# Altium PCB USB_CAN.PcbDoc
Units mm, origin at the board's own origin, x right, y up, seen from the top; angles counter-clockwise.
Board outline 50 x 33 mm, 2 copper layers (Top Layer, Bottom Layer); 42 components, 27 nets, 156 pads, 9 vias.
Unrouted connection lines stored in the file: 8.
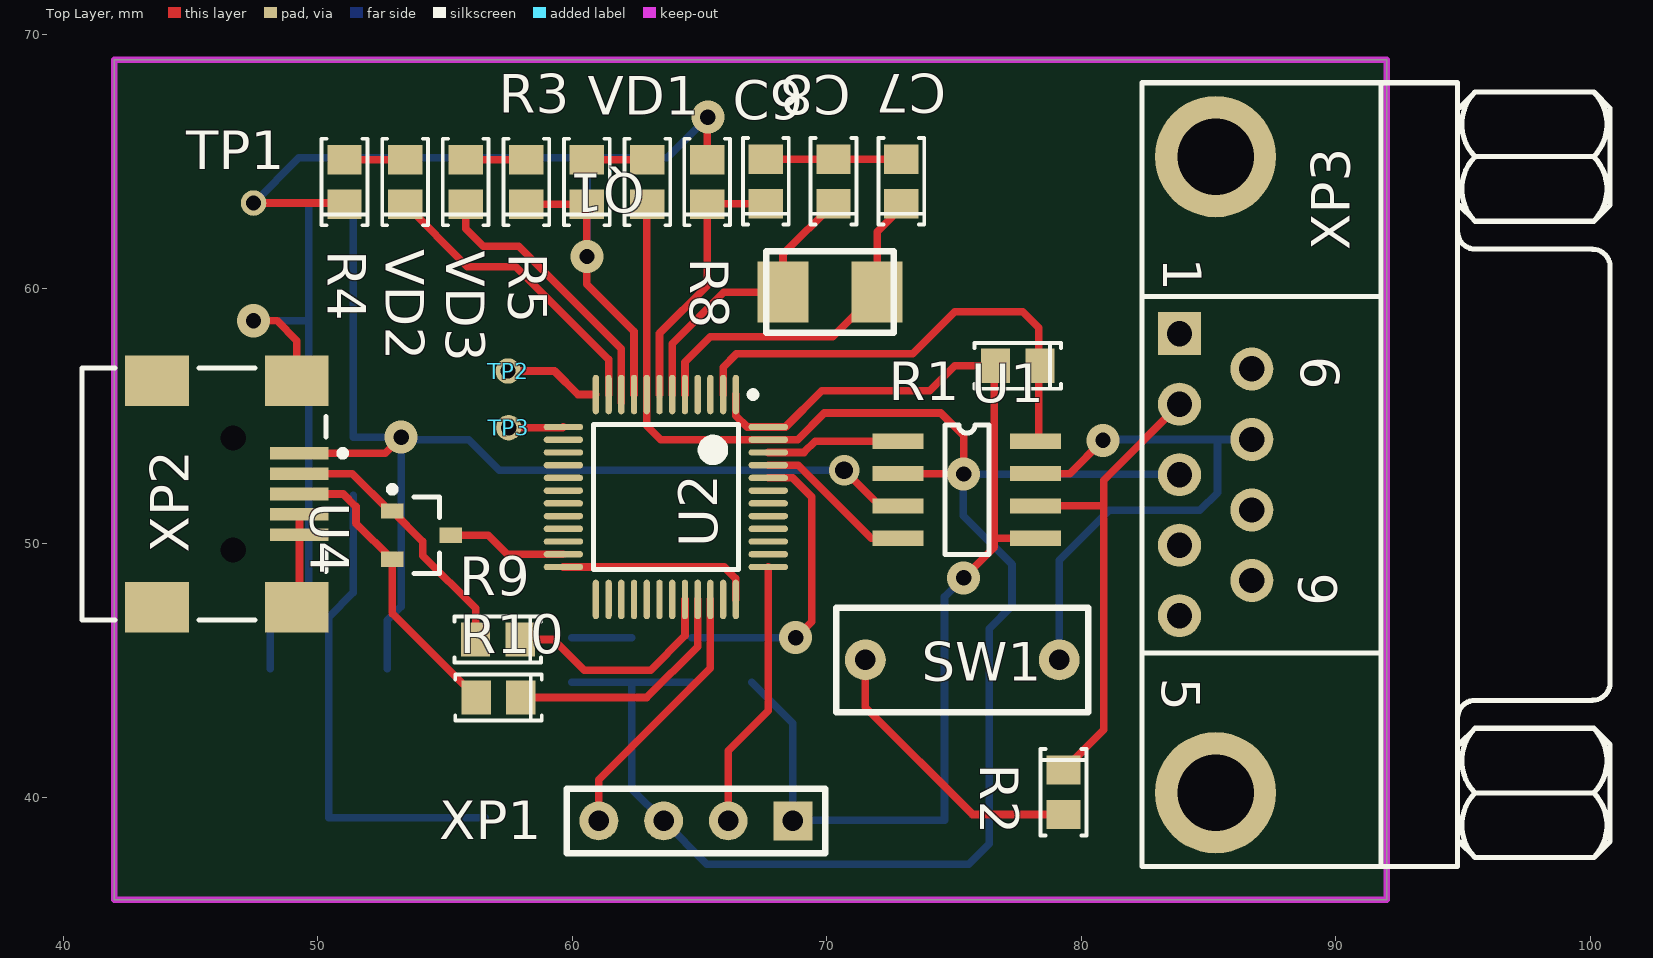
[diagram p0: Top Layer view]
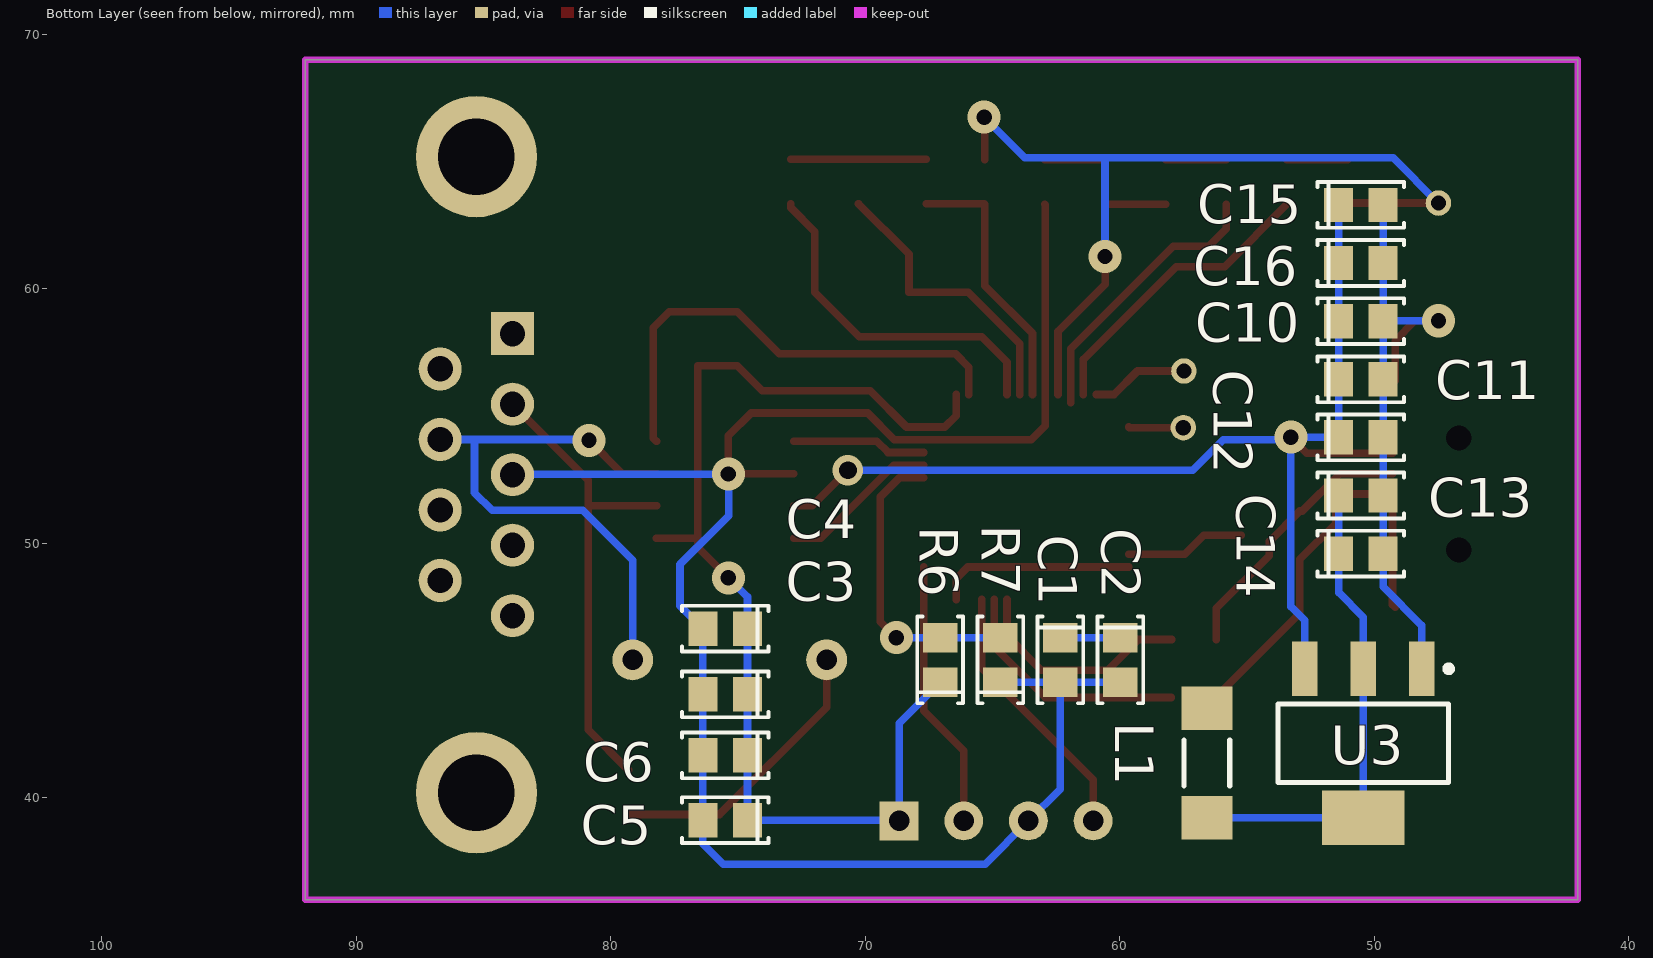
[diagram p1: Bottom Layer view, seen from below]

## Layer stack, top to bottom
Top Solder: solder mask 0.0102, Solder Resist, Dk 3.5
Top Layer: signal copper 0.0356
Dielectric 1: dielectric 0.32, FR-4, Dk 4.8
Bottom Layer: signal copper 0.0356
Bottom Solder: solder mask 0.0102, Solder Resist, Dk 3.5

## Board outline
42,36 92,36 92,69 42,69

## Design rules (kind name [scope] priority, off if disabled: settings)
Clearance [All] p1: gap=0.254 ignorepadtopadclearanceinfootprint=FALSE except(0: Arc-Hole Track-Hole SMDPad-Hole THPad-Hole Via-Hole Fill-Hole Poly-Hole Region-Hole Text-Hole; 0.2: Arc-Arc Arc-Track Arc-SMDPad Track-Track Track-SMDPad SMDPad-SMDPad)
HoleSize [All] p1: absolutevalues=TRUE maxlimit=3 minlimit=0.3 maxpercent=80.000 minpercent=20.000
PolygonConnect [All] p1: connectstyle=Relief reliefconductorwidth=0.254 reliefentries=4 polygonreliefangle="90 Angle" airgapwidth=0.254
RoutingVias [All] p1: holewidth=0.7 width=1.2 viastyle="Through Hole" minholewidth=0.5 minwidth=1 maxholewidth=0.7 maxwidth=1.5
SolderMaskExpansion [All] p1: expansion=0.102
UnRoutedNet [All] p1: checkbadconnections=TRUE
Width [All] p1: maxlimit=0.4 minlimit=0.2 preferedwidth=0.3
28 further rules are at their usual default settings.

## Classes and differential pairs
component class CAN: C1 C2 R1 R2 SW1 U1 XP3
component class MCU: C3 C4 C5 C6 C7 C8 C9 Q1 R3 R4 R5 R6 R7 R8 TP1 TP2 TP3 U2 VD1 VD2 VD3 XP1
component class PWR: C10 C11 C12 C13 C14 L1 U3
component class USB: C15 C16 R9 R10 U4 XP2

## Components (designator, comment, footprint, x,y, rotation, side; value= is the part's Value field where it differs from the comment)
C1 "" SMD_0805 62.333,45.425 r270 bottom value=100nF
C2 "" SMD_0805 59.975,45.425 r270 bottom value=100nF
C3 "100nF" SMD_0805 75.5,44.075 r0 bottom
C4 "100nF" SMD_0805 75.5,46.65 r0 bottom
C5 "100nF" SMD_0805 75.5,39.125 r0 bottom
C6 "100nF" SMD_0805 75.5,41.675 r0 bottom
C7 "22pF" SMD_0805 72.925,64.225 r90 top
C8 "22pF" SMD_0805 70.263,64.225 r90 top
C9 "100nF" SMD_0805 67.6,64.225 r90 top
C10 "1uF" SMD_0805 50.525,58.733 r180 bottom
C11 "1uF" SMD_0805 50.525,56.45 r180 bottom
C12 "1uF" SMD_0805 50.525,54.167 r180 bottom
C13 "100n" SMD_0805 50.525,49.6 r180 bottom
C14 "100n" SMD_0805 50.525,51.883 r180 bottom
C15 "" SMD_0805 50.525,63.3 r180 bottom value=100nF
C16 "" SMD_0805 50.525,61.017 r180 bottom value=100nF
L1 "" INDC4516AM 56.575,41.375 r90 bottom
Q1 "8MHz" 5032-2Pin_CRYSTAL 70.125,59.875 r180 top
R1 "10k" SMD_0805 77.5,56.975 r180 top
R2 "120" SMD_0805 79.3,40.225 r270 top
R3 "10k" SMD_0805 60.57,64.2 r90 top
R4 "10k" SMD_0805 51.05,64.2 r90 top
R5 "10k" SMD_0805 58.19,64.2 r90 top
R6 "0" SMD_0805 67.05,45.425 r90 bottom
R7 "10k" SMD_0805 64.692,45.425 r90 bottom
R8 "10k" SMD_0805 65.3,64.2 r90 top
R9 "22" SMD_0805 57.075,46.225 r180 top
R10 "22" SMD_0805 57.1,43.95 r180 top
SW1 "SW" DIP_SW_1 75.325,45.425 r270 top
TP1 "" TP 47.475,63.375 r90 top
TP2 "" TP 57.475,56.775 r90 top
TP3 "" TP 57.5,54.55 r90 top
U1 "TJA1051" SO8-150mil 72.8,54.015 r0 top
U2 "STM32F072C8T6" STM-LQFP48_L 63.675,51.825 r270 top
U3 "AMS1117" SOT-223 50.425,42.15 r270 bottom
U4 "CDSOT23-SM712" SOT23-3 54.075,50.325 r0 top
VD1 "" SMD_0805 62.95,64.2 r90 top
VD2 "" SMD_0805 53.43,64.2 r90 top
VD3 "" SMD_0805 55.81,64.2 r90 top
XP1 "CON_4" HEAD-1/4/2.54 68.665,39.1 r270 top
XP2 "USB" USB/SM0.8-6H5 41.43,51.943 r180 top
XP3 "CON_11" DSUB1.385-2H9A 94.775,52.7 r270 top locked

## Footprints (in the part's own frame and the unit in brackets; to place one, negate y for a bottom-side part, rotate by r counter-clockwise, add the part's x,y. Pads: shape width x height; smd on the part's side, far side on the other; paste and mask are expansions set on the pad)
5032-2Pin_CRYSTAL [mm]
  rect 2x2.4 smd: 1(-1.85,0) 2(1.85,0)
  silkscreen extent -2.5,-1.6 2.5,1.6
DIP_SW_1 [mm] "DIP_SWITCH"
  round 1.6 hole 0.8: 1(0,3.81) 2(0,-3.81)
  silkscreen extent -2.05,-4.95 2.05,4.95
DSUB1.385-2H9A [mm] "Connector; D Subminiature AMPLIMITE 2000; 9 Position; Right Angle"
  rect 1.69x1.69 hole 1: 1(-5.54,-10.92)
  round 1.69 hole 1: 2(-2.77,-10.92) 3(0,-10.92) 4(2.77,-10.92) 5(5.54,-10.92) 6(-4.155,-8.08) 7(-1.385,-8.08) 8(1.385,-8.08) 9(4.155,-8.08)
  round 4.76 hole 3: 10(-12.495,-9.5) 11(12.495,-9.5)
  silkscreen extent -15.4,-12.4 15.4,6, body extent -15.4,-12.4 15.4,6.06, height 12.75
HEAD-1/4/2.54 [mil]
  rect 60x60 hole 31.5: 1(0,0)
  round 60 hole 31.5: 2(0,-100) 3(0,-200) 4(0,-300)
  silkscreen extent -50,-350 50,50
INDC4516AM [mm] "Chip Inductor, Body 4.5x1.6mm, IPC Low Density"
  rect 1.7x2 smd: 1(-2.15,0) 2(2.15,0)
  silkscreen extent -0.9,-0.9 0.9,0.9, body extent -2.4,-0.95 2.4,0.95, height 1.8
SMD_0805 [mm] "Chip smd, 2-Leads, Body 2.00x1.25mm, IPC Medium Density"
  rect 1.15x1.35 smd: 1(-0.875,0) 2(0.875,0)
  silkscreen extent -1.7,-0.9 1.7,0.9
SO8-150mil [mm]
  rect 2x0.6 smd: 1(0,0) 2(0,-1.27) 3(0,-2.54) 4(0,-3.81) 5(5.4,-3.81) 6(5.4,-2.54) 7(5.4,-1.27) 8(5.4,0)
  silkscreen extent 1.84,-4.44 3.56,0.64
SOT23-3 [mm]
  rect 0.9x0.6 smd: 1(-1.15,0.95) 2(-1.15,-0.95) 3(1.15,0)
  silkscreen extent -1.27,-1.5 0.7,1.92, body extent -0.7,-1.5 0.7,1.5, height 1.1
SOT-223 [mm]
  rect 2.15x1 smd: 1(-2.925,2.3) 2(-2.925,0) 3(-2.925,-2.3)
  rect 2.15x3.25 smd: 4(2.925,0)
  silkscreen extent -3.05,-3.35 1.55,3.47, body extent -1.85,-3.35 1.85,3.35, height 1.8
STM-LQFP48_L [mm] "QFP, 48-Leads, Body 7x7mm, Pitch 0.5mm, IPC High Density"
  oval 1.55x0.25 smd: 1(-4.025,2.75) 2(-4.025,2.25) 3(-4.025,1.75) 4(-4.025,1.25) 5(-4.025,0.75) 6(-4.025,0.25) 7(-4.025,-0.25) 8(-4.025,-0.75) 9(-4.025,-1.25) 10(-4.025,-1.75) 11(-4.025,-2.25) 12(-4.025,-2.75) 25(4.025,-2.75) 26(4.025,-2.25) 27(4.025,-1.75) 28(4.025,-1.25) 29(4.025,-0.75) 30(4.025,-0.25) 31(4.025,0.25) 32(4.025,0.75) 33(4.025,1.25) 34(4.025,1.75) 35(4.025,2.25) 36(4.025,2.75)
  oval 0.25x1.55 smd: 13(-2.75,-4.025) 14(-2.25,-4.025) 15(-1.75,-4.025) 16(-1.25,-4.025) 17(-0.75,-4.025) 18(-0.25,-4.025) 19(0.25,-4.025) 20(0.75,-4.025) 21(1.25,-4.025) 22(1.75,-4.025) 23(2.25,-4.025) 24(2.75,-4.025) 37(2.75,4.025) 38(2.25,4.025) 39(1.75,4.025) 40(1.25,4.025) 41(0.75,4.025) 42(0.25,4.025) 43(-0.25,4.025) 44(-0.75,4.025) 45(-1.25,4.025) 46(-1.75,4.025) 47(-2.25,4.025) 48(-2.75,4.025)
  silkscreen extent -4.15,-2.85 2.85,3.55, body extent -3.5,-3.5 3.5,3.5, height 1.6
TP [mm]
  round 1 hole 0.6: 1(0,0)
USB/SM0.8-6H5 [mm] "Connector; USB2.0, Type B, SM; 5 Position; Right Angle"
  rect 2.3x0.5 smd: 1(-7.85,-1.6) 2(-7.85,-0.8) 3(-7.85,0) 4(-7.85,0.8) 5(-7.85,1.6)
  rect 2.5x2 smd: 6(-7.75,4.45) 7(-2.25,4.45) 8(-7.75,-4.45) 9(-2.25,-4.45)
  round 0.6 hole 1: MH1(-5.25,2.2) MH2(-5.25,-2.2)
  silkscreen extent -9.68,-4.95 0.7,4.95, body extent -8.9,-4.95 0.7,4.95, height 3.9

## Part data
C1 C2 C3 C4 C5 C6 C7 C8 C9 C10 C11 C12 C13 C14 C15 C16: library part C_NONE_POLAR, "None polar capacitor"
L1: library part FB
Q1: library part CRYSTAL, "Crystal oscillator"
R1 R2 R3 R4 R5 R6 R7 R8 R9 R10: library part RES, "Resistor"
SW1: "Switch"
TP1 TP2 TP3: library part TP, "TP"
U2: "ARM Cortex-M0 32-bit MCU, 64 KB Flash, 8 KB Internal RAM, 39 I/Os, 48-pin LQFP, -40 to 85 degC, Tray", I/Os (High Current)=39, Operating Frequency(F) (Processor speed) (MHz)=48, PartNumber=STM32F030C8T6, Supplier Part Number 1=497-14043-ND, Supply Voltage(Vcc) min (V)=2.4, ComponentLink1Description="Manufacturer URL", ComponentLink1URL=http://www.st.com/web/en/home.html, ComponentLink2Description=Datasheet, ComponentLink2URL=http://www.st.com/st-web-ui/static/active/en/resource/technical/document/datasheet/DM00088500.pdf, ComponentLink3Description="Package Specification", ComponentLink3URL=http://www.st.com/st-web-ui/static/active/en/resource/technical/document/datasheet/DM00058181.pdf, Core="ARM Cortex-M0", DatasheetVersion="Rev. 1", FLASH Size (Prog) (kB)=64, Internal RAM Size (kB)=8, Mounting Technology="Surface Mount", PackageDescription="48-Pin Low Profile Quad Flat Package, 7 x 7 mm Body, 0.5 mm Pitch", PackageReference=LQFP48, PackageVersion="Rev. 6, 06/2013", Packing=Tray, Supplier 1=Digi-Key, Supplier 2=Newark, Supplier 3=Mouser, Supplier Part Number 2=06X3647, Supplier Part Number 3=511-STM32F030C8T6
VD1 VD2 VD3: library part LED

## Via types
v1: diameter 1.3, hole 0.6, Top Layer to Bottom Layer, 8 vias
v2: diameter 1.2, hole 0.7, Top Layer to Bottom Layer, 1 vias

## Nets (pads, with @x,y where several pads share a name; then routed paths per layer and width w, separated by ;. In a path a pad name is that pad's centre, name@x,y a point inside that pad or via, vN(x,y) a via of type N, cw(c..) or ccw(c..) an arc to the next point about the centre after c; other vN are vias at no path point)
+3V3: C1.1 C2.1 C3.1 C4.1 C5.1 C6.1 L1.2 R1.2 R3.1 R4.1 R5.1 R6.1 R8.2 TP1.1 U1.5 U2.1 U2.9 U2.24 U2.36 U2.48 XP1.1 | length 93.7
  Top Layer w0.3: TP1.1 51,63.375 R4.1 ; R5.1 R3.1 60.57,60.18 62.425,58.325 U2.9 ; U2.24 65.972,49.075 66.425,48.622 U2.36 ; R8.2 65.3,66.725 v1(65.325,66.75) ; U2.1 66.425,55.025 66.875,54.575 U2.48 68.375,54.575 69.8,56 74.05,56 75.025,56.975 76.575,56.975 76.575,50.205 ; v1(75.375,48.65) 76.575,49.85 76.575,50.205 ; U1.5 76.575,50.205
  Bottom Layer w0.3: TP1.1 49.25,65.15 60.575,65.15 ; C2.1 C1.1 ; v1(60.575,61.275) 60.575,65.15 ; v1(65.325,66.75) 63.725,65.15 60.575,65.15 ; R6.1 68.665,42.935 XP1.1 68.69,39.125 C5.1 C6.1 C3.1 C4.1 74.625,47.9 v1(75.375,48.65)
+5V: C10.1 C11.1 C12.1 C15.1 C16.1 U1.3 U3.3 XP2.1 | length 45.2
  Top Layer w0.3: XP2.1 52.643,53.543 v1(53.275,54.175) ; v2(70.675,52.875) 72.075,51.475 U1.3
  Bottom Layer w0.3: C15.1 C16.1 C10.1 C11.1 C12.1 51.408,54.175 v1(53.275,54.175) ; U3.3 52.725,46.975 53.275,47.525 v1(53.275,54.175) ; v2(70.675,52.875) 57.125,52.875 55.925,54.075 53.375,54.075 v1(53.275,54.175)
GND: C1.2 C2.2 C3.2 C4.2 C5.2 C6.2 C7.2 C8.2 C9.2 C10.2 C11.2 C12.2 C13.2 C14.2 C15.2 C16.2 R7.1 U1.2 U2.8 U2.23 U2.47 U3.1 U4.3 VD1.1 XP1.3 XP2.4 XP2.5 XP2.6 XP2.8 XP3.3 | length 113.4
  Top Layer w0.3: v1(47.475,58.75) 48.4,58.75 49.18,57.97 XP2.8 ; XP2.6 49.28,47.593 XP2.5 XP2.4 ; U4.3 56.7,50.325 57.45,49.575 U2.23 ; VD1.1 62.925,63.3 U2.8 62.925,54.625 63.475,54.075 U2.47 68.85,54.075 69.9,55.125 74.475,55.125 75.375,54.225 v1(75.375,52.725) 75.355,52.745 U1.2 ; C9.2 C8.2 C7.2
  Bottom Layer w0.3: v1(47.475,58.75) 49.633,58.75 C10.2 ; U3.1 48.125,46.775 49.65,48.3 C13.2 C14.2 C12.2 C11.2 C10.2 ; C15.2 C16.2 C10.2 ; C2.2 C1.2 ; R7.1 C1.2 ; v1@75.335,52.745 v1@75.355,52.725 ; XP3.3 83.83,52.725 v1(75.375,52.725) v1@75.355,52.725 ; C1.2 62.333,40.352 XP1.3 65.285,37.4 75.575,37.4 76.375,38.2 C5.2 C6.2 C3.2 C4.2 77.275,47.55 77.275,49.175 75.355,51.095 v1@75.355,52.725
LED1: U2.10 VD3.1 | length 12.3
  Top Layer w0.3: VD3.1 55.81,62.365 56.5,61.675 57.9,61.675 61.925,57.65 61.925,57.018 ; U2.10@61.925,55.521 61.925,57.018 ; U2.10 61.925,57.018
LED2: U2.11 VD2.1 | length 11.9
  Top Layer w0.3: VD2.1 55.88,60.875 57.775,60.875 61.425,57.225 U2.11
NetC7_1: C7.1 Q1.1 U2.5 | length 13.8
  Top Layer w0.3: U2.5 64.425,57.125 65.425,58.125 70.225,58.125 Q1.1 71.975,62.25 72.925,63.2 C7.1
NetC8_1: C8.1 Q1.2 U2.6 | length 11.5
  Top Layer w0.3: U2.6 63.925,57.85 65.95,59.875 Q1.2 68.275,61.363 C8.1
NetC9_1: C9.1 R8.1 U2.7 | length 10.6
  Top Layer w0.3: U2.7 63.425,57.038 63.425,58.25 65.3,60.125 R8.1 65.325,63.35 C9.1
NetC13_1: C13.1 C14.1 L1.1 U3.2 U3.4 | length 19.2
  Bottom Layer w0.3: C14.1 C13.1 51.4,48.075 50.425,47.1 U3.2 U3.4 L1.1
NetR1_1: R1.1 U1.8 U2.2 | length 19.1
  Top Layer w0.3: U2.2 65.925,56.925 66.45,57.45 73.375,57.45 75.025,59.1 77.7,59.1 78.325,58.475 78.325,54.14 U1.8
NetR2_1: R2.1 U1.6 XP3.2 | length 18.9
  Top Layer w0.3: U1.6 80.875,51.475 ; R2.1 80.875,42.675 80.875,51.475 ; XP3.2 80.875,52.49 80.875,51.475
NetR2_2: R2.2 SW1.2 | length 11.4
  Top Layer w0.3: SW1.2 71.515,43.56 75.725,39.35 R2.2
NetR3_2: R3.2 VD1.2 | length 2.4
  Top Layer w0.3: R3.2 VD1.2
NetR4_2: R4.2 VD2.2 | length 2.4
  Top Layer w0.3: R4.2 VD2.2
NetR5_2: R5.2 VD3.2 | length 2.4
  Top Layer w0.3: VD3.2 R5.2
NetR6_2: R6.2 R7.2 U2.44 | length 11.9
  Top Layer w0.3: U2.44 68.65,52.575 69.4,51.825 69.4,46.925 v1(68.775,46.3)
  Bottom Layer w0.3: R7.2 R6.2 v1(68.775,46.3)
NetR9_2: R9.2 U4.1 XP2.2 | length 10.7
  Top Layer w0.3: XP2.2 51.357,52.743 52.825,51.275 U4.1 54.125,50.075 54.125,49.525 56.2,47.45 R9.2
NetR10_2: R10.2 U4.2 XP2.3 | length 11.9
  Top Layer w0.3: XP2.3 51.007,51.943 51.5,51.45 51.5,50.8 U4.2 52.925,47.25 R10.2
NetSW1_1: SW1.1 U1.7 XP3.7 | length 22.4
  Top Layer w0.3: U1.7 79.545,52.745 v1(80.85,54.05)
  Bottom Layer w0.3: SW1.1 79.135,49.335 81.1,51.3 84.65,51.3 85.35,52 85.35,54.085 ; v1(80.85,54.05) 80.885,54.085 85.35,54.085 ; XP3.7 85.35,54.085
NetTP2_1: TP2.1 U2.12 | length 3.8
  Top Layer w0.3: TP2.1 59.3,56.775 60.225,55.85 U2.12
NetTP3_1: TP3.1 U2.13 | length 2.2
  Top Layer w0.3: TP3.1 59.625,54.55 U2.13
NetU1_1: U1.1 U2.46 | length 5.3
  Top Layer w0.3: U2.46 69.1,53.575 69.54,54.015 U1.1
NetU1_4: U1.4 U2.45 | length 6.3
  Top Layer w0.3: U2.45 68.875,53.075 71.745,50.205 U1.4
SWCLK: U2.37 XP1.2 | length 10.6
  Top Layer w0.3: XP1.2 66.125,41.85 67.7,43.425 U2.37
SWDIO: U2.34 XP1.4 | length 10.5
  Top Layer w0.3: XP1.4 61.045,40.72 65.425,45.1 U2.34
USB_DM: R9.1 U2.32 | length 9
  Top Layer w0.3: R9.1 59.275,46.225 60.475,45.025 63.075,45.025 64.425,46.375 U2.32
USB_DP: R10.1 U2.33 | length 9.6
  Top Layer w0.3: R10.1 62.925,43.95 64.925,45.95 U2.33
pads on no net: U2.3 U2.4 U2.14 U2.15 U2.16 U2.17 U2.18 U2.19 U2.20 U2.21 U2.22 U2.25 U2.26 U2.27 U2.28 U2.29 U2.30 U2.31 U2.35 U2.38 U2.39 U2.40 U2.41 U2.42 U2.43 XP2.7 XP2.9 XP2.MH1 XP2.MH2 XP3.1 XP3.4 XP3.5 XP3.6 XP3.8 XP3.9 XP3.10 XP3.11

## Keep-outs
Keep-Out Layer:
  lines w0.254: 42,36 92,36 92,69 42,69 42,37 42,36

## Silkscreen, mask and mechanical layers (free items; w line width, h text height)
Drill Drawing:
  circle w0.254: c23.556,81.39 r0.508
  circle w0.254: c23.556,81.39 r0.847
  lines w0.254: 22.709,86.047 24.403,86.047 23.556,84.353 22.709,86.047 ; 22.709,88.587 23.133,88.587 23.556,88.163 23.979,88.587 24.403,88.587 23.979,89.01 24.403,89.433 23.979,89.433 23.556,89.857 23.133,89.433 22.709,89.433 23.133,89.01 22.709,88.587 ; 22.709,91.973 24.403,91.973 24.403,93.667 22.709,93.667 22.709,91.973 ; 22.709,95.783 24.403,95.783 24.403,97.477 22.709,97.477 22.709,95.783 ; 23.048,92.312 24.064,92.312 24.064,93.328 23.048,93.328 23.048,92.312
  lines w0.381: 21.191,79.4 288.172,79.4 ; 21.191,98.45 288.172,98.45 ; 35.183,75.59 35.183,102.26 ; 48.641,75.59 48.641,102.26 ; 77.589,75.59 77.589,102.26 ; 90.438,75.59 90.438,102.26 ; 109.077,75.59 109.077,102.26 ; 147.165,75.59 147.165,102.26 ; 162.147,75.59 162.147,102.26 ; 181.091,75.59 181.091,102.26 ; 197.596,75.59 197.596,102.26 ; 219.282,75.59 219.282,102.26 ; 253.156,75.59 253.156,102.26 ; 21.191,75.59 288.172,75.59 288.172,102.26 21.191,102.26 21.191,75.59
  text "Symbol" at 23.477,99.593 h1.83
  text "Count" at 36.326,99.593 h1.83
  text "Hole Size" at 49.784,99.593 h1.83
  text "Plated" at 78.732,99.593 h1.83
  text "Hole Type" at 91.581,99.593 h1.83
  text "Drill Layer Pair" at 110.22,99.593 h1.83
  text "Via/Pad" at 148.308,99.593 h1.83
  text "Pad Shape" at 163.29,99.593 h1.83
  text "Template" at 182.234,99.593 h1.83
  text "Description" at 198.739,99.593 h1.83
  text "Hole Tolerance (+)" at 220.425,99.593 h1.83
  text "Hole Tolerance (-)" at 254.299,99.593 h1.83
  text "1" at 36.326,95.783 h1.52
  text "0,700mm (27,56mil)" at 49.784,95.783 h1.52
  text "PTH" at 78.732,95.783 h1.52
  text "Round" at 91.581,95.783 h1.52
  text "Top Layer - Bottom Layer" at 110.22,95.783 h1.52
  text "Via" at 148.308,95.783 h1.52
  text "Rounded" at 163.29,95.783 h1.52
  text "v120h70" at 182.234,95.783 h1.52
  text "2" at 36.326,91.973 h1.52
  text "3,000mm (118,11mil)" at 49.784,91.973 h1.52
  text "PTH" at 78.732,91.973 h1.52
  text "Round" at 91.581,91.973 h1.52
  text "Top Layer - Bottom Layer" at 110.22,91.973 h1.52
  text "Pad" at 148.308,91.973 h1.52
  text "Rounded" at 163.29,91.973 h1.52
  text "c476h300" at 182.234,91.973 h1.52
  text "6" at 36.326,88.163 h1.52
  text "0,800mm (31,50mil)" at 49.784,88.163 h1.52
  text "PTH" at 78.732,88.163 h1.52
  text "Round" at 91.581,88.163 h1.52
  text "Top Layer - Bottom Layer" at 110.22,88.163 h1.52
  text "Pad" at 148.308,88.163 h1.52
  text "(Mixed)" at 163.29,88.163 h1.52
  text "(Mixed)" at 182.234,88.163 h1.52
  text "11" at 36.326,84.353 h1.52
  text "0,600mm (23,62mil)" at 49.784,84.353 h1.52
  text "PTH" at 78.732,84.353 h1.52
  text "Round" at 91.581,84.353 h1.52
  text "Top Layer - Bottom Layer" at 110.22,84.353 h1.52
  text "(Mixed)" at 148.308,84.353 h1.52
  text "Rounded" at 163.29,84.353 h1.52
  text "(Mixed)" at 182.234,84.353 h1.52
  text "11" at 36.326,80.543 h1.52
  text "1,000mm (39,37mil)" at 49.784,80.543 h1.52
  text "PTH" at 78.732,80.543 h1.52
  text "Round" at 91.581,80.543 h1.52
  text "Top Layer - Bottom Layer" at 110.22,80.543 h1.52
  text "Pad" at 148.308,80.543 h1.52
  text "(Mixed)" at 163.29,80.543 h1.52
  text "(Mixed)" at 182.234,80.543 h1.52
  text "31 Total" at 36.326,76.733 h1.52

## Text inside footprints (layer, text, board x,y; h text height)
XP2: Mechanical 1 "PCB Edge" at 40.998,55.979 h0.25 r270
XP3: Top Overlay "1" at 83.225,61.225 h1.5 r270; Top Overlay "5" at 83.15,44.725 h1.5 r270; Top Overlay "9" at 88.525,48.85 h1.5 r270; Top Overlay "6" at 88.625,57.35 h1.5 r270